# Altium PCB V1.1.PcbDoc
Units mil, origin at the board's own origin, x right, y up, seen from the top; angles counter-clockwise.
Board outline 1117.33 x 2554.15 mil, 2 copper layers (Top Layer, Bottom Layer); 43 components, 47 nets, 204 pads, 175 vias.
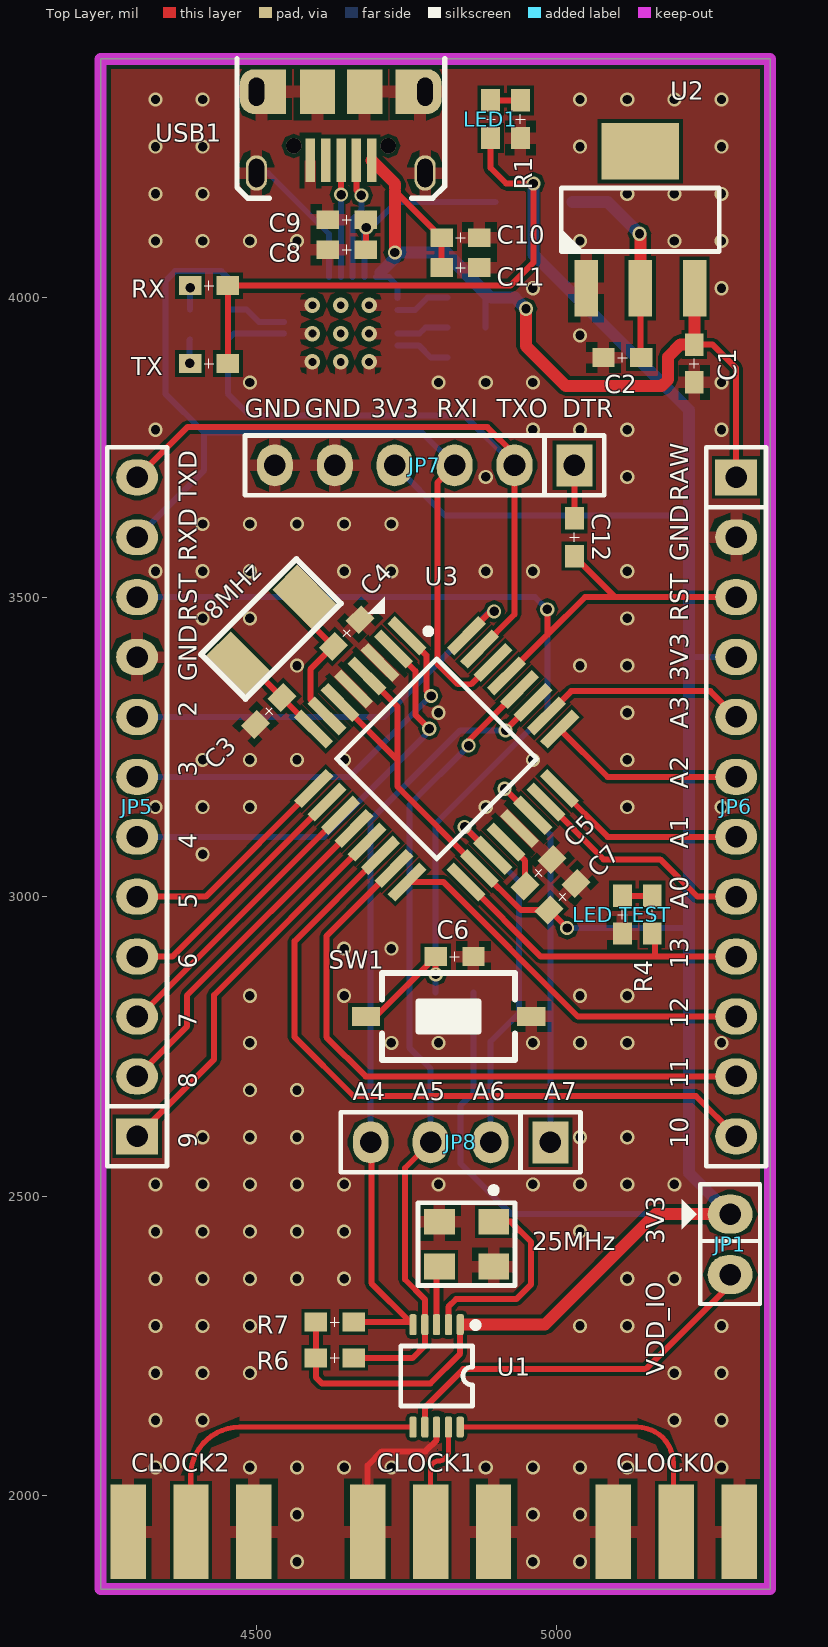
[diagram p0: Top Layer view]
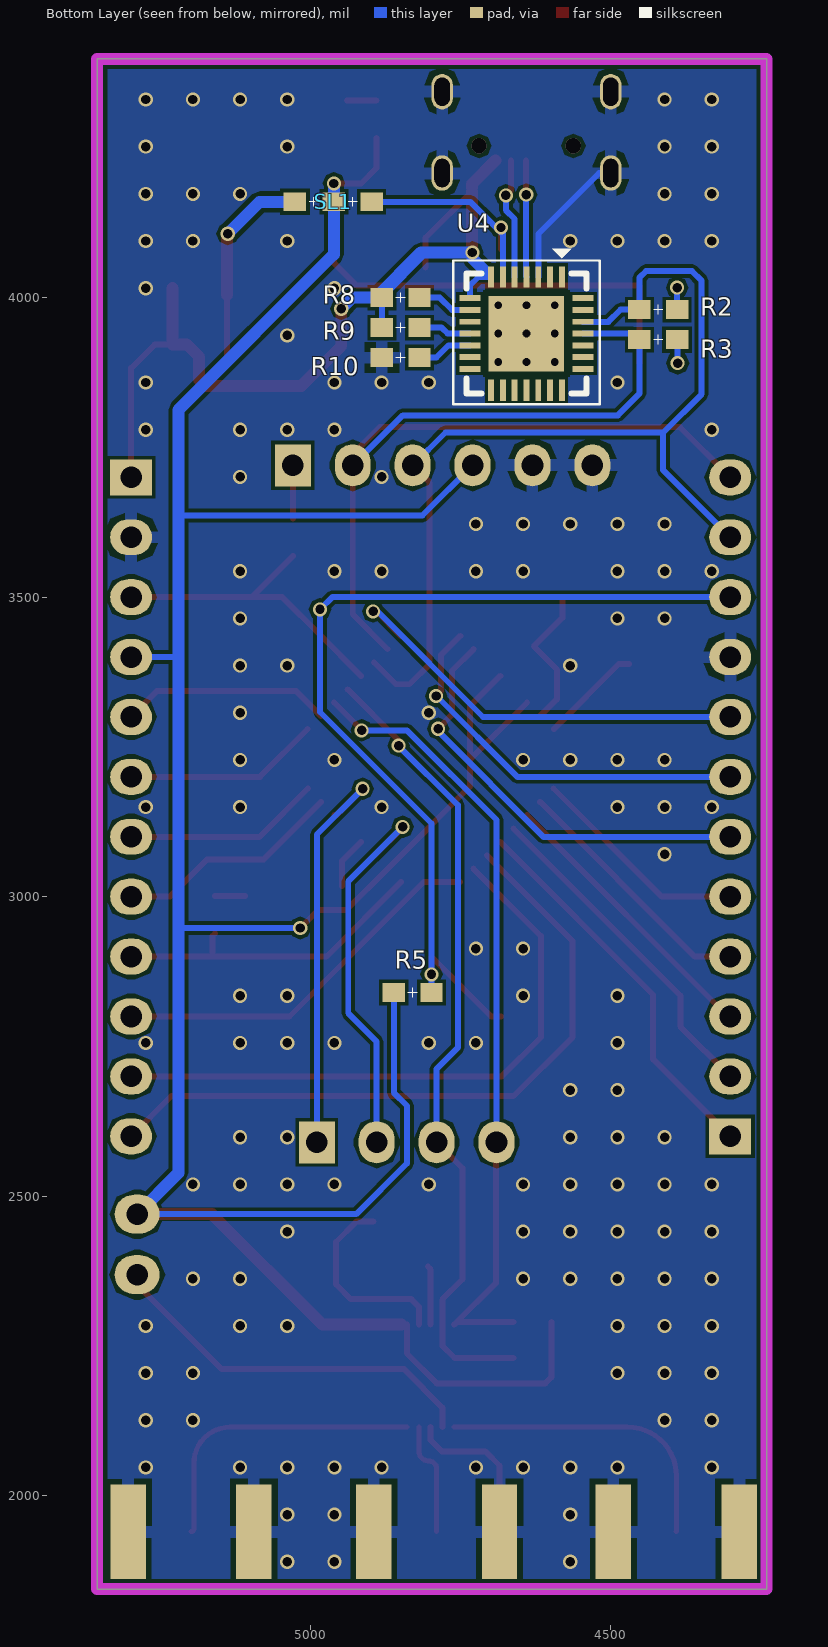
[diagram p1: Bottom Layer view, seen from below]
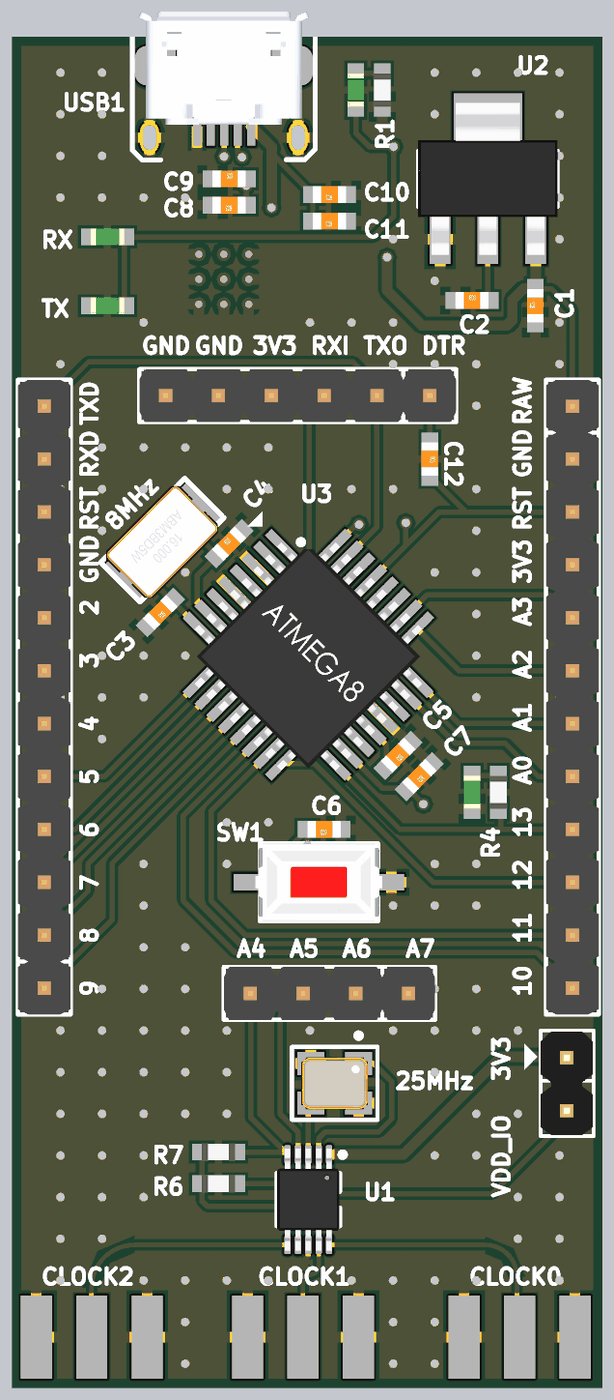
[diagram p2: 3D render of the assembled board from above, using the file's embedded part models]
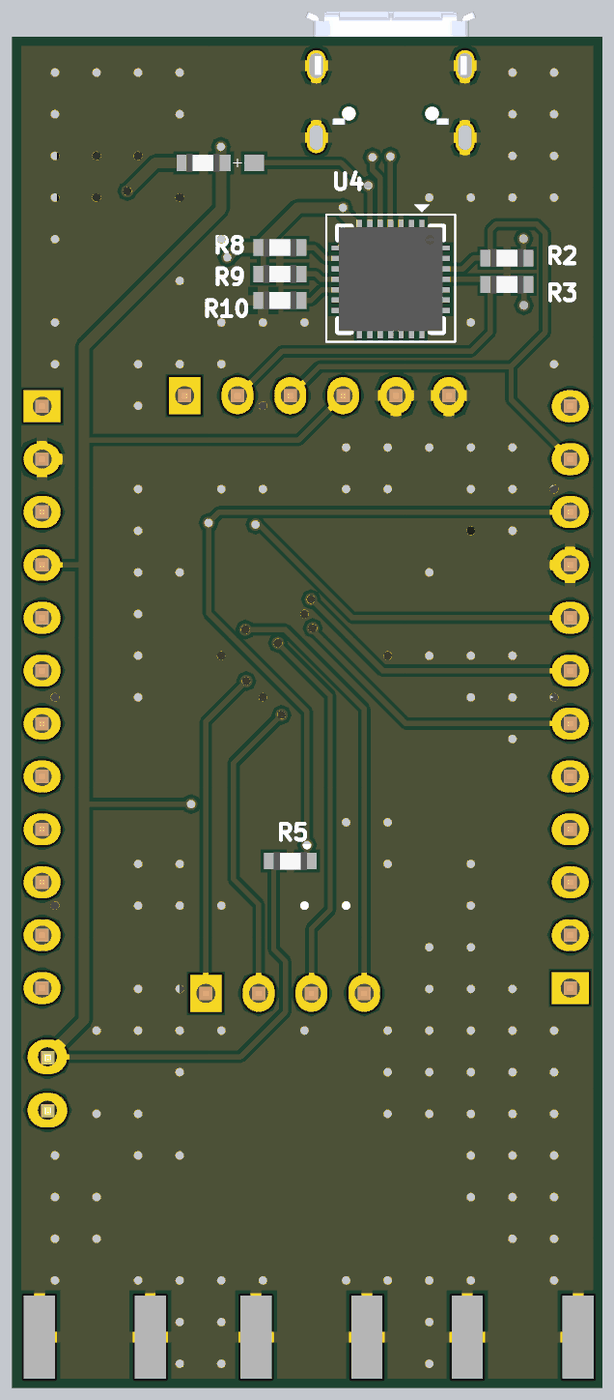
[diagram p3: 3D render of the assembled board from below, using the file's embedded part models]

## Layer stack, top to bottom
Top Solder: solder mask 0.4, Solder Resist, Dk 3.5
Top Layer: signal copper 1.4
Dielectric 1: dielectric 12.6, FR-4, Dk 4.8
Bottom Layer: signal copper 1.4
Bottom Solder: solder mask 0.4, Solder Resist, Dk 3.5

## Board outline
4239.31,1844.2 5356.64,1844.2 5356.64,4398.35 4239.31,4398.35

## Design rules (kind name [scope] priority, off if disabled: settings)
Clearance [All] p1: gap=6
PolygonConnect [All] p1: connectstyle=Relief reliefconductorwidth=20 reliefentries=4 polygonreliefangle="90 Angle" airgapwidth=10
RoutingVias [All] p1: holewidth=15.75 width=23.62 viastyle="Through Hole" minholewidth=15.75 minwidth=23.62 maxholewidth=15.75 maxwidth=23.62
SolderMaskExpansion [All] p1: expansion=4
Width [All] p1: maxlimit=20 minlimit=8.45 preferedwidth=10
30 further rules are at their usual default settings.

## Components (designator, comment, footprint, x,y, rotation, side; value= is the part's Value field where it differs from the comment)
8MHz "8Mhz" "XT 5032" 4580,3500 r225 top (schematic designator X1)
25MHz "XT4_SMD" XT4-3.2x2.5 4850,2420 r180 top (schematic designator XTAL1)
C1 "100nF" 0603_cap 5230,3890 r90 top
C2 "100nF" 0603_cap 5110,3900 r0 top
C3 "22pF" 0603_cap 4520,3310 r225 top
C4 "22pF" 0603_cap 4650,3440 r45 top
C5 "100nF" 0603_cap 4970,3040 r225 top
C6 "1uF" 0603_cap 4830,2900 r180 top
C7 "100nF" 0603_cap 5010,3000 r225 top
C8 "100nF" 0603_cap 4650,4080 r180 top
C9 "4.7uF" 0603_cap 4650,4130 r0 top
C10 "10uF" 0603_cap 4840,4100 r180 top
C11 "100nF" 0603_cap 4840,4050 r180 top
C12 "1uF" 0603_cap 5030,3600 r270 top
CLOCK0 "132134" SMA-132322 5200,1940 r270 top (schematic designator JP2)
CLOCK1 "132134" SMA-132322 4790,1940 r270 top (schematic designator JP3)
CLOCK2 "132134" SMA-132322 4390,1940 r270 top (schematic designator JP4)
JP1 "Header 2" JP2 5290,2470 r270 top
JP5 "JP12" JP12-D1T 4300,2600 r90 top locked
JP6 "JP12" JP12-D1T 5300,3700 r270 top locked
JP7 "JP6" JP6-D1T 5030,3720 r180 top
JP8 "JP4" JP4-D1T 4990,2590 r180 top
LED1 "LED SMD" 0603_LED 4890,4297.87 r90 top
"LED TEST" "LED SMD" 0603_LED 5110,2970 r270 top
R1 "1k" 0603_res 4940,4297.87 r90 top
R2 "1k" 0603_res 4420,3980 r180 bottom
R3 "1k" 0603_res 4420,3930 r180 bottom
R4 "1k" 0603_res 5160,2970 r90 top
R5 "1k" 0603_res 4830,2840 r0 bottom
R6 "10K" 0603_res 4630,2230 r180 top
R7 "10K" 0603_res 4630,2290 r180 top
R8 "4k7" 0603_res 4850,4000 r180 bottom
R9 "4k7" 0603_res 4850,3950 r180 bottom
R10 "4k7" 0603_res 4850,3900 r180 bottom
RX "LED SMD" 0603_LED 4420,4020 r180 top (schematic designator LED2)
SL1 "SL" SL_0603 4930,4160 r0 bottom
SW1 "SW" SW-SMD 4820,2800 r180 top
TX "LED SMD" 0603_LED 4420,3890 r180 top (schematic designator LED3)
U1 "Si5351" MSOP10_L 4800,2200 r270 top
U2 "AMS1117" SOT223_N 5140,4130 r90 top
U3 "ATMEGA328P-AU" QFP7X7-G32/X.45N 4800,3230 r315 top
U4 "CP2102" "QFN28 - 9" 4640,3940 r270 bottom
USB1 "Micro USB" "MICROUSB - v2" 4640,4300 r180 top

## Footprints (in the part's own frame and the unit in brackets; to place one, negate y for a bottom-side part, rotate by r counter-clockwise, add the part's x,y. Pads: shape width x height; smd on the part's side, far side on the other; paste and mask are expansions set on the pad)
0603_cap [mm]
  rect 0.95x0.8 smd mask+0: 1(-0.8,0) 2(0.8,0)
  silkscreen extent -0.2,-0.2 0.2,0.2, body extent -0.8,-0.4 0.8,0.4, height 0.3
0603_LED [mm]
  rect 0.95x0.8 smd mask+0: 1(-0.8,0) 2(0.8,0)
  silkscreen extent -0.2,-0.2 0.2,0.2, body extent -0.8,-0.4 0.8,0.4, height 0.38
0603_res [mm]
  rect 0.95x0.8 smd mask+0: 1(-0.8,0) 2(0.8,0)
  silkscreen extent -0.2,-0.2 0.2,0.2, body extent -0.8,-0.43 0.8,0.43, height 0.48
JP2 [mil]
  oval 65x75 hole 36: 1(0,0) 2(101,0)
  silkscreen extent -50,-81 150,50, body extent -48,-50 148,48, height 323
JP4-D1T [mil] "4 pins, 1 row, straight, gold plating"
  rect 60x70 hole 36: 1(0,0)
  oval 60x70 hole 36: 2(100,0) 3(200,0) 4(300,0)
  silkscreen extent -50,-50 350,50, body extent -50,-50 350,50, height 336
JP6-D1T [mil] "6 pins, 1 row, straight, gold plating"
  rect 60x70 hole 36: 1(0,0)
  oval 60x70 hole 36: 2(100,0) 3(200,0) 4(300,0) 5(400,0) 6(500,0)
  silkscreen extent -50,-50 550,50, body extent -50,-50 550,50, height 336
JP12-D1T [mil] "12 pins, 1 row, straight, gold plating"
  rect 60x70 hole 36: 1(0,0)
  oval 60x70 hole 36: 2(100,0) 3(200,0) 4(300,0) 5(400,0) 6(500,0) 7(600,0) 8(700,0) 9(800,0) 10(900,0) 11(1000,0) 12(1100,0)
  silkscreen extent -50,-50 1150,50, body extent -50,-50 1150,50, height 336
"MICROUSB - v2" [mm]
  rect 0.4x1.85 smd: 1(-1.312,1.8) 2(-0.663,1.8) 3(-0.012,1.8) 4(0.637,1.8) 5(1.288,1.8)
  oval 0.9x1.5 hole 0.65 slot 1.2 at 90 deg: 6(3.575,2.338) 7(-3.575,2.338) 8(3.575,-1.112) 9(-3.575,-1.112)
  rect 1.5x1.9 smd: 8(0.988,-1.112) 9(-1.012,-1.112)
  rect 1x1.9 smd: 8(2.812,-1.112) 9(-2.812,-1.112)
  rrect80% 1.5x1.9 smd: 8(3.525,-1.112) 9(-3.525,-1.112)
  silkscreen extent -4.4,-2.5 4.4,3.41, body extent -4.1,-3.7 4.1,1.73, height 2.71
MSOP10_L [mil]
  rrect50% 35x12.01 smd: 1(-85.5,39.37)
  rrect50% 35x12 smd: 2(-85.5,19.69) 3(-85.5,0) 4(-85.5,-19.69) 5(-85.5,-39.37) 6(85.5,-39.37) 7(85.5,-19.69) 8(85.5,0) 9(85.5,19.69) 10(85.5,39.37)
  silkscreen extent -90,-60 50,70, body extent -96,-59 96,59, height 45
"QFN28 - 9" [mm]
  rect 3.2x3.2 smd: 0(0,0)
  rect 0.9x0.25 smd mask+0.02: 1(-2.4,1.5) 2(-2.4,1) 3(-2.4,0.5) 4(-2.4,0) 5(-2.4,-0.5) 6(-2.4,-1) 7(-2.4,-1.5) 15(2.4,-1.5) 16(2.4,-1) 17(2.4,-0.5) 18(2.4,0) 19(2.4,0.5) 20(2.4,1) 21(2.4,1.5)
  rect 0.25x0.9 smd mask+0.02: 8(-1.5,-2.4) 9(-1,-2.4) 10(-0.5,-2.4) 11(0,-2.4) 12(0.5,-2.4) 13(1,-2.4) 14(1.5,-2.4) 22(1.5,2.4) 23(1,2.4) 24(0.5,2.4) 25(0,2.4) 26(-0.5,2.4) 27(-1,2.4) 28(-1.5,2.4)
  silkscreen extent -3.6,-3.1 3,3.1, body extent -2.5,-2.5 2.5,2.5, height 1
QFP7X7-G32/X.45N [mm] "QFP; 32 Leads; Body 7 x 7 mm; Pitch 0.8 mm"
  rect 1.905x0.45 smd: 1(-4.583,2.8) 2(-4.583,2) 3(-4.583,1.2) 4(-4.583,0.4) 5(-4.583,-0.4) 6(-4.583,-1.2) 7(-4.583,-2) 8(-4.583,-2.8) 17(4.572,-2.806) 18(4.572,-2.006) 19(4.572,-1.206) 20(4.572,-0.406) 21(4.572,0.394) 22(4.572,1.194) 23(4.572,1.994) 24(4.572,2.794)
  rect 0.45x1.905 smd: 9(-2.794,-4.572) 10(-1.994,-4.572) 11(-1.194,-4.572) 12(-0.394,-4.572) 13(0.406,-4.572) 14(1.206,-4.572) 15(2.006,-4.572) 16(2.806,-4.572) 25(2.8,4.583) 26(2,4.583) 27(1.2,4.583) 28(0.406,4.572) 29(-0.4,4.583) 30(-1.2,4.583) 31(-2,4.583) 32(-2.8,4.583)
  silkscreen extent -6.43,-3 3,3.7, body extent -4.74,-4.86 4.86,4.74, height 1.13
SL_0603 [mm]
  rect 0.95x0.8 smd mask+0: 1(-0.8,0) 2(0.8,0) 3(2.451,0)
  silkscreen extent -0.2,-0.2 1.85,0.2, body extent 0.85,-0.43 2.45,0.43, height 0.48
SMA-132322 [mm] "SMA"
  rect 4x1.5 smd: 1(0,0) 2(0,2.667) 3(0,-2.667)
  rect 4x1.5 smd far side: 4(0,-2.667) 5(0,2.667)
  body extent -1.84,-3.17 11.46,3.18, height 3.8
SOT223_N [mm] "SOT223, 4-Leads, Body 6.5x3.5mm, Pitch 2.3mm, Lead Span 7mm, IPC Medium Density"
  rect 2.4x1 smd: 1(-2.9,2.3) 2(-2.9,0) 3(-2.9,-2.3)
  rect 2.4x3.3 smd: 4(2.9,0)
  silkscreen extent -1.35,-3.35 1.35,3.4, body extent -3.65,-3.35 3.65,3.35, height 1.8
SW-SMD [mm] "Switch SMD type"
  rect 1.2x0.8 smd: 1(-3.5,0) 2(3.5,0)
  silkscreen extent -2.82,-1.85 2.82,1.85, body extent -3.05,-1.85 3.05,1.85, height 2.5
XT4-3.2x2.5 [mm]
  rect 1.3x1.1 smd: 1(-1.15,-0.95) 2(1.15,-0.95) 3(1.15,0.95) 4(-1.15,0.95)
  silkscreen extent -2.06,-2.41 2.06,1.75, body extent -1.6,-1.25 1.6,1.25, height 0.61
"XT 5032" [mm]
  rect 1.5x2.4 smd: 1(0,0) 2(4,0)
  silkscreen extent -0.89,-1.4 4.83,1.27, body extent -0.47,-1.6 4.53,1.6, height 1.31

## Part data
8MHz: library part XT455k, "Crystal 455kHz Infrared"
25MHz: "4 pin crystal surface mount"
C1 C2 C3 C4 C5 C6 C7 C8 C9 C10 C11 C12: library part CN4, "Cap np W0.4"
CLOCK0 CLOCK1 CLOCK2: "SMA Connector - STRAIGHT JACK FOR P.C. BOARD - Female"
JP1: "Header, 2-Pin"
JP5 JP6: library part Con12, "Connector 12"
JP7: library part Con6, "Connector 6"
JP8: library part Con4, "Connector 4"
LED1 "LED TEST" RX TX: library part LED-SMD-0603
R1 R2 R3 R4 R5 R6 R7 R8 R9 R10: library part R, "Resistor 1/4W"
SW1: library part SW2, "Switch button 2 pin"
U1: "I2C-PROGRAMMABLE ANY-FREQUENCY CMOS CLOCK"
U3: "8-bit AVR Microcontrollers"
U4: "SINGLE-CHIP USB-TO-UART BRIDGE"
USB1: library part "USB Micro"

## Via types
v1: diameter 23.62, hole 15.75, Top Layer to Bottom Layer, tented both sides, 164 vias
v2: diameter 25.98, hole 12.99, Top Layer to Bottom Layer, tented both sides, 9 vias
v3: diameter 25.59, hole 25.59, Top Layer to Bottom Layer, tented both sides, 2 vias

## Nets (pads, with @x,y where several pads share a name; then routed paths per layer and width w, separated by ;. In a path a pad name is that pad's centre, name@x,y a point inside that pad or via, vN(x,y) a via of type N, cw(c..) or ccw(c..) an arc to the next point about the centre after c; other vN are vias at no path point)
A0: JP6.8 U3.23 | length 382.8
  Top Layer w10: U3.23 5078.56,3062.46 5173.01,3062.46 5235.47,3000 JP6.8
A1: JP6.7 U3.24 | length 328.3
  Top Layer w10: U3.24 5085.56,3100 JP6.7
A2: JP6.6 U3.25 | length 327.5
  Top Layer w10: U3.25 5085.17,3200 JP6.6
A3: JP6.5 U3.26 | length 351.7
  Top Layer w10: U3.26 5024.49,3343.14 5256.86,3343.14 JP6.5
A4: JP8.4 R7.1 U1.5 U3.27 | length 1320
  Top Layer w10: R7.1 U1.5@4756.13,2290 ; JP8.4 4691.2,2588.8 4691.2,2354.93 U1.5@4756.13,2290 ; U1.5 U1.5@4756.13,2290 ; v1(4915.15,3277.67) 4914.49,3277.67 U3.27
  Bottom Layer w10: JP8.4 4690,3128.09 4839.58,3277.67 v1(4915.15,3277.67)
A5: JP8.3 R6.1 U1.4 U3.28 | length 1345.9
  Top Layer w10: R6.1 4760,2230 4780.31,2250.32 U1.4 4780.31,2327.86 4747.14,2361.03 4747.14,2547.14 JP8.3 ; v1(4853.4,3252.25) 4853.4,3260.77 U3.28
  Bottom Layer w10: JP8.3 4790,2712.47 4754.59,2747.88 4754.59,3152.98 4853.86,3252.25 v1(4853.4,3252.25)
A6: JP8.2 U3.19 | length 650.5
  Top Layer w10: v1(4846.73,3116.43) 4846.73,3116.12 U3.19
  Bottom Layer w10: v1(4846.73,3116.43) 4937.51,3025.65 4937.51,2805.47 4890,2757.95 JP8.2
A7: JP8.1 U3.22 | length 687.3
  Top Layer w10: v1(4913.47,3180.22) 4957.73,3135.96 U3.22
  Bottom Layer w10: v1(4913.47,3180.22) 4990,3103.69 JP8.1
D2: JP5.8 U3.32 | length 732.2
  Top Layer w10: U3.32 4890.32,3476.22 v1(4896.01,3476.22)
  Bottom Layer w10: JP5.8 4712.56,3300 4888.78,3476.22 v1(4896.01,3476.22)
D3: JP5.7 U3.1 | length 664.1
  Top Layer w10: U3.1 4782.9,3403 4782.9,3342.95 v1(4790.89,3334.96)
  Bottom Layer w10: JP5.7 4655.27,3200 4790.23,3334.96 v1(4790.89,3334.96)
D4: JP5.6 U3.2 | length 722.5
  Top Layer w10: U3.2 4764.61,3376.75 4764.61,3303.41 v1(4787.59,3280.42)
  Bottom Layer w10: JP5.6 4611.77,3100 4787.59,3275.82 v1(4787.59,3280.42)
D5: JP5.5 U3.9 | length 369.7
  Top Layer w10: JP5.5 4414.44,3000 U3.9
D6: JP5.4 U3.10 | length 424.2
  Top Layer w10: JP5.4 4358.98,2900 U3.10
D7: JP5.3 U3.11 | length 478.6
  Top Layer w10: JP5.3 4303.52,2800 U3.11
D8: JP5.2 U3.12 | length 563.5
  Top Layer w10: JP5.2 4383.11,2783.11 4383.11,2835.05 U3.12
D9: JP5.1 U3.13 | length 650.5
  Top Layer w10: JP5.1 4428.55,2728.55 4428.55,2835.94 U3.13
D10: JP6.12 U3.14 | length 1168.6
  Top Layer w10: U3.14 4562.96,2925.81 4562.96,2765.58 4661.32,2667.21 5232.79,2667.21 JP6.12
D+: U4.4 USB1.3 | length 194.8
  Top Layer w10: v1(4640.49,4172.01) USB1.3
  Bottom Layer w10: U4.4 4640.49,4034.98 v1(4640.49,4172.01)
D-: U4.5 USB1.2 | length 204.1
  Top Layer w10: USB1.2 4666.08,4178.99 v1(4674.35,4170.73)
  Bottom Layer w10: U4.5 4659.69,4131.26 4674.35,4145.93 v1(4674.35,4170.73)
DTR: C12.1 JP7.1 | length 88.5
  Top Layer w10: C12.1 JP7.1
"EXTERNAL 3V3": C2.2 SL1.3 U2.2 | length 339.9
  Top Layer w10: C2.2@5140,3901.5 U2.2@5140,4004.53
  Top Layer w20: v1(5138.67,4106.6) 5140,4105.27 U2.2 U2.2@5140,4004.53
  Bottom Layer w20: SL1.3 5085.27,4160 v1(5138.67,4106.6)
GND: 25MHz.2 25MHz.4 "LED TEST.2" C1.1 C2.1 C3.2 C4.2 C5.1 C6.1 C7.1 C8.2 C9.1 C10.1 C11.1 CLOCK0.2 CLOCK0.3 CLOCK0.4 CLOCK0.5 CLOCK1.2 CLOCK1.3 CLOCK1.4 CLOCK1.5 CLOCK2.2 CLOCK2.3 CLOCK2.4 CLOCK2.5 JP5.9 JP6.2 JP7.5 JP7.6 R1.1 R10.1 SW1.1 U1.8 U2.1 U3.3 U3.5 U3.21 U4.0 U4.3 USB1.5 USB1.6 USB1.7 USB1.8 USB1.9 | length 499.7
  Top Layer w10: CLOCK1.3 4685,2050.39 4708.56,2073.95 4781.28,2073.95 4800,2092.67 U1.8
  Bottom Layer w10: USB1.6 4518.59,4207.95 4620.32,4106.23 U4.3
  other v1: 4566.93,1889.76 4960.63,1889.76 5039.37,1889.76 4566.93,1968.51 4960.63,1968.51 5039.37,1968.51 4330.71,2047.25 4488.19,2047.25 4566.93,2047.25 4645.67,2047.25 4724.41,2047.25 4881.89,2047.25 4960.63,2047.25 5039.37,2047.25 5118.11,2047.25 5275.59,2047.25 4330.71,2125.99 4409.45,2125.99 5196.85,2125.99 5275.59,2125.99 4330.71,2204.73 4409.45,2204.73 4488.19,2204.73 5196.85,2204.73 5275.59,2204.73 4330.71,2283.47 4409.45,2283.47 4488.19,2283.47 5039.37,2283.47 5118.11,2283.47 5275.59,2283.47 4330.71,2362.21 4409.45,2362.21 4488.19,2362.21 4566.93,2362.21 4645.67,2362.21 5118.11,2362.21 5196.85,2362.21 4330.71,2440.95 4409.45,2440.95 4488.19,2440.95 4566.93,2440.95 4645.67,2440.95 5039.37,2440.95 4330.71,2519.69 4409.45,2519.69 4488.19,2519.69 4566.93,2519.69 4645.67,2519.69 4803.15,2519.69 4960.63,2519.69 5039.37,2519.69 5118.11,2519.69 5196.85,2519.69 4409.45,2598.43 4488.19,2598.43 4566.93,2598.43 5039.37,2598.43 5118.11,2598.43 4488.19,2677.17 4566.93,2677.17 4488.19,2755.91 4724.41,2755.91 4803.15,2755.91 4960.63,2755.91 5039.37,2755.91 5118.11,2755.91 5275.59,2755.91 4488.19,2834.65 4645.67,2834.65 5039.37,2834.65 5118.11,2834.65 4645.67,2913.39 4724.41,2913.39 4409.45,3070.87 4330.71,3149.61 4409.45,3149.61 4488.19,3149.61 4881.89,3149.61 5118.11,3149.61 5275.59,3149.61 4409.45,3228.35 4488.19,3228.35 4566.93,3228.35 4645.67,3228.35 4960.63,3228.35 5118.11,3228.35 4803.15,3307.09 5118.11,3307.09 4566.93,3385.83 5039.37,3385.83 5118.11,3385.83 4409.45,3464.57 4488.19,3464.57 5118.11,3464.57 4330.71,3543.31 4409.45,3543.31 4488.19,3543.31 4645.67,3543.31 4724.41,3543.31 4881.89,3543.31 4960.63,3543.31 5118.11,3543.31 4409.45,3622.05 4488.19,3622.05 4566.93,3622.05 4645.67,3622.05 4724.41,3622.05 4881.89,3700.79 5118.11,3700.79 4330.71,3779.53 4960.63,3779.53 5039.37,3779.53 5118.11,3779.53 5275.59,3779.53 4488.19,3858.27 4803.15,3858.27 4881.89,3858.27 4960.63,3858.27 5275.59,3858.27 5039.37,3937.01 4960.63,4015.75 5275.59,4015.75 4330.71,4094.49 4409.45,4094.49 4488.19,4094.49 4566.93,4094.49 5039.37,4094.49 5196.85,4094.49 5275.59,4094.49 4330.71,4173.23 4409.45,4173.23 5118.11,4173.23 5196.85,4173.23 5275.59,4173.23 4330.71,4251.97 4409.45,4251.97 5039.37,4251.97 5275.59,4251.97 4330.71,4330.71 4409.45,4330.71 5039.37,4330.71 5118.11,4330.71 5196.85,4330.71 5275.59,4330.71
  other v2: 4592.75,3892.75 4640,3892.75 4687.24,3892.75 4592.75,3940 4640,3940 4687.24,3940 4592.75,3987.24 4640,3987.24 4687.24,3987.24
"INTERNAL 3V3": C8.1 C9.2 SL1.1 U4.6 | length 362.8
  Top Layer w10: C8.1 4682.5,4081 v1(4682.5,4116.99)
  Bottom Layer w10: U4.6 v1@4679.37,4105.67 ; v1(4682.5,4116.99) 4679.37,4113.86 v1@4679.37,4105.67 ; SL1.1 4733.7,4160 v1@4679.37,4105.67
MISO: JP6.10 U3.16 | length 642.2
  Top Layer w10: U3.16 4811.06,3024.61 5035.67,2800 JP6.10
MOSI: JP6.11 U3.15 | length 1039.3
  Top Layer w10: U3.15 4615.84,2934.15 4615.84,2765.57 4681.4,2700 JP6.11
Net8MHz_1: 8MHz.1 C4.1 U3.7 | length 245.1
  Top Layer w10: 8MHz.1 4580,3465.46 C4.1 4589.33,3379.33 4589.33,3329.32 U3.7
Net8MHz_2: 8MHz.2 C3.1 U3.8 | length 171
  Top Layer w10: 8MHz.2 4485.46,3388.64 U3.8
Net25MHz_1: 25MHz.1 U1.2 | length 331
  Top Layer w10: U1.2 4819.69,2315.42 4832.28,2328.01 4933.18,2328.01 4957.89,2352.72 4957.89,2423.55 4924.04,2457.4 25MHz.1
Net25MHz_3: 25MHz.3 U1.3 | length 99.1
  Top Layer w10: U1.3 4800,2377.87 25MHz.3
NetC5_2: C5.2 U3.20 | length 86.8
  Top Layer w10: U3.20 4947.73,3059.67 C5.2
NetLED1_2: LED1.2 R1.2 | length 50
  Top Layer w10: LED1.2 R1.2
"NetLED TEST_1": "LED TEST.1" R4.2 | length 50
  Top Layer w10: 5110,3001.5 R4.2
NetR2_2: R2.2 RX.2 | length 36.6
  Bottom Layer w10: R2.2 v1(4388.5,4016.63)
NetR3_2: R3.2 TX.2 | length 40.6
  Top Layer w10: v1(4387.81,3890.7) TX.2
  Bottom Layer w10: v1(4387.81,3890.7) 4387.81,3929.3 R3.2
NetR8_2: R8.2 U4.9 | length 92.6
  Bottom Layer w10: U4.9 4764.15,3979.37 4784.78,4000 R8.2
NetR9_2: R9.2 U4.11 | length 88.2
  Bottom Layer w10: U4.11 4771.49,3940 4781.49,3950 R9.2
NetR10_2: R10.2 U4.12 | length 92.4
  Bottom Layer w10: U4.12 4770.07,3920.32 4790.39,3900 R10.2
PLL_CLOCK0: CLOCK0.1 U1.10 | length 507.2
  Top Layer w8.45: U1.10 5134.9,2114.5 cw(c5134.9,2054.31) 5195.1,2054.31 5195.1,1944.9 ccw(c5200,1944.9) CLOCK0.1
PLL_CLOCK1: CLOCK1.1 U1.9 | length 191.4
  Top Layer w8.45: CLOCK1.1 4790,2045 cw(c4802.93,2045) 4802.93,2057.93 ccw(c4802.93,2074.68) 4819.68,2074.68 U1.9
PLL_CLOCK2: CLOCK2.1 U1.6 | length 511
  Top Layer w8.45: CLOCK2.1 4389.56,1940 4389.56,2033 cw(c4471.06,2033) 4471.06,2114.5 U1.6
RAW: C1.2 C10.2 C11.2 JP6.1 R8.1 R9.1 U2.3 U4.7 U4.8 USB1.1 | length 1782
  Top Layer w10: USB1.1 4691.67,4223.3 4730.78,4184.19 4730.78,4177.72 C10.2 C11.2 ; C1.2 5260.68,3921.5 5300,3882.17 JP6.1
  Top Layer w20: USB1.1 4730.78,4190.02 4730.78,4184.19 ; v1(4730.34,4075.32) 4730.78,4075.76 4730.78,4177.72 ; v1(4949.19,3981.46) 4949.19,3919.05 5015.76,3852.47 5175.66,3852.47 5186.36,3863.17 5186.36,3901.22 5207.2,3922.05 5230.55,3922.05 U2.3
  Bottom Layer w10: 4706.15,4041.58 U4.7 4720.16,4034.49 4734.49,4020.16 U4.8 ; v1@4730.78,4075.76 4805.73,4075.76 4806.17,4075.32 R8.1 R9.1
  Bottom Layer w20: 4706.15,4041.58 4730.34,4065.78 v1(4730.34,4075.32) 4806.17,4075.32 4816.09,4075.32 4891.42,4000 4930.65,4000 v1(4949.19,3981.46)
RESET: C6.2 C12.2 JP5.10 JP6.3 R5.1 SW1.2 U3.29 | length 2174.5
  Top Layer w10: SW1.2 4698.5,2800 C6.2 v1(4798.5,2870.34) ; U3.29 4984.7,3436.98 ; v1(4984.7,3479.5) 4984.7,3436.98 ; C12.2 5098.5,3500 ; JP6.3 5098.5,3500 ; 4984.7,3436.98 5047.73,3500 5098.5,3500
  Bottom Layer w10: JP5.10 4964.21,3500 v1(4984.7,3479.5) 4984.7,3308.36 4798.5,3122.16 v1(4798.5,2870.34) R5.1
RX: JP5.11 JP7.3 R2.1 U3.30 U4.26 | length 1677.7
  Top Layer w10: JP7.3 4801.72,3691.72 4801.72,3388.17 4835.3,3354.59 4857.78,3354.59 U3.30
  Bottom Layer w10: JP5.11 4411.86,3711.86 4411.86,3774.88 ; U4.26 4503.32,3959.69 4483.01,3980 R2.1 4451.5,4033.28 4440.57,4044.21 4363.61,4044.21 4347.74,4028.33 4347.74,3839 4411.86,3774.88 ; JP7.3 4775.12,3774.88 4411.86,3774.88
SCK: JP6.9 R4.1 U3.17 | length 542.7
  Top Layer w10: U3.17 4973.77,2900 5164.16,2900 ; R4.1 5164.16,2934.35 5164.16,2900 ; JP6.9 5164.16,2900
TX: JP5.12 JP7.2 R3.1 U3.31 U4.25 | length 1749.3
  Top Layer w10: JP5.12 4383.75,3783.75 4884.73,3783.75 4930,3738.49 JP7.2 4930,3471.36 U3.31
  Bottom Layer w10: U4.25 4461.5,3940 R3.1 4451.5,3839.68 4487.59,3803.58 4846.42,3803.58 JP7.2
VDD_3V3: C7.2 JP1.1 JP6.4 JP7.4 LED1.1 R5.2 R6.2 R7.2 RX.1 SL1.2 TX.1 U1.1 U3.4 U3.6 U3.18 | length 6022.4
  Top Layer w10: TX.1 RX.1 4923.2,4020 4961.5,4058.3 v1(4961.5,4190.53) 4916.02,4190.53 4890,4216.55 LED1.1 ; R7.2 R6.2 4598.5,2197.69 4608.57,2187.63 4789.87,2187.63 4839.37,2237.13 U1.1 4848.59,2285.5 ; U3.6 4734.44,3228.75 ; U3.4 4734.44,3317.84 4734.44,3228.75 ; v1(5017.76,2947.7) C7.2 4940.58,2977.73 U3.18 4734.44,3183.87 4734.44,3228.75
  Top Layer w20: 4848.59,2285.5 4980.59,2285.5 5165.09,2470 JP1.1
  Bottom Layer w10: JP7.4 4813.76,3636.24 5218.37,3636.24 5220.89,3638.76 ; R5.2 4861.5,2672.93 4839.51,2650.95 4839.51,2554.88 4924.39,2470 JP1.1 ; v1(5017.76,2947.7) 5219.37,2947.7 5220.89,2946.18 ; 5220.89,3397.65 5223.24,3400 JP6.4
  Bottom Layer w20: v1(4961.5,4190.53) SL1.2 4961.5,4072.12 5220.89,3812.72 5220.89,3638.76 5220.89,3397.65 5220.89,2946.18 5220.89,2539.11 JP1.1
VDD_IO: JP1.2 U1.7 | length 644
  Top Layer w10: U1.7 4780.31,2147.11 4844.35,2211.15 5148.8,2211.15 5290,2352.34 JP1.2
pads on no net: U2.4 U4.1 U4.2 U4.10 U4.13 U4.14 U4.15 U4.16 U4.17 U4.18 U4.19 U4.20 U4.21 U4.22 U4.23 U4.24 U4.27 U4.28 USB1.4
copper on no net:
  other v3: 4561.75,4253.23 4719.23,4253.23

## Polygon pours and split planes (outlines as drawn)
GND on Bottom Layer "Bottom Layer-No Net" (solid, pour order 0): 4762.99,4397.19 5358.36,4397.19 5358.36,3193.82 5358.36,1841.62 4815.97,1841.62 4238.26,1841.62 4238.26,3400.7 4238.26,4404.77 4657.03,4404.77
GND on Top Layer "Bottom Layer-No Net" (solid, pour order 2): 4795.79,4399.71 5355.84,4399.71 5355.84,3249.33 5355.84,1849.19 4760.47,1849.19 4240.78,1849.19 4240.78,3037.42 4240.78,4409.81 4624.23,4409.81

## Keep-outs
Keep-Out Layer:
  the board outline again, w20

## Silkscreen, mask and mechanical layers (free items; w line width, h text height)
Top Overlay:
  text "GND" at 4480,3800 h30
  text "GND" at 4580,3800 h30
  text "3V3" at 4690,3800 h30
  text "RXI" at 4800,3800 h30
  text "TXO" at 4900,3800 h30
  text "DTR" at 5010,3800 h30
  text "TXD" at 4400,3660 h30 r90
  text "RAW" at 5220,3660 h30 r90
  text "RXD" at 4400,3560 h30 r90
  text "GND" at 5220,3560 h30 r90
  text "RST" at 4400,3460 h30 r90
  text "RST" at 5220,3460 h30 r90
  text "GND" at 4400,3360 h30 r90
  text "3V3" at 5220,3360 h30 r90
  text "2" at 4400,3300 h30 r90
  text "A3" at 5220,3280 h30 r90
  text "3" at 4400,3200 h30 r90
  text "A2" at 5220,3180 h30 r90
  text "4" at 4400,3080 h30 r90
  text "A1" at 5220,3080 h30 r90
  text "5" at 4400,2980 h30 r90
  text "A0" at 5220,2980 h30 r90
  text "6" at 4400,2880 h30 r90
  text "13" at 5220,2880 h30 r90
  text "7" at 4400,2780 h30 r90
  text "12" at 5220,2780 h30 r90
  text "8" at 4400,2680 h30 r90
  text "11" at 5220,2680 h30 r90
  text "A4" at 4660,2660 h30
  text "A5" at 4760,2660 h30
  text "A6" at 4860,2660 h30
  text "A7" at 4980,2660 h30
  text "9" at 4400,2580 h30 r90
  text "10" at 5220,2580 h30 r90
  text "3V3" at 5180,2420 h30 r90
  text "VDD_IO" at 5180,2200 h30 r90